# Altium PCB stepperRegulator.PcbDoc
Units mm, origin at the board's own origin, x right, y up, seen from the top; angles counter-clockwise.
Board outline 152.4 x 101.6 mm, 2 copper layers (Top Layer, Bottom Layer); 121 components, 46 nets, 290 pads, 0 vias.
Unrouted connection lines stored in the file: 232.
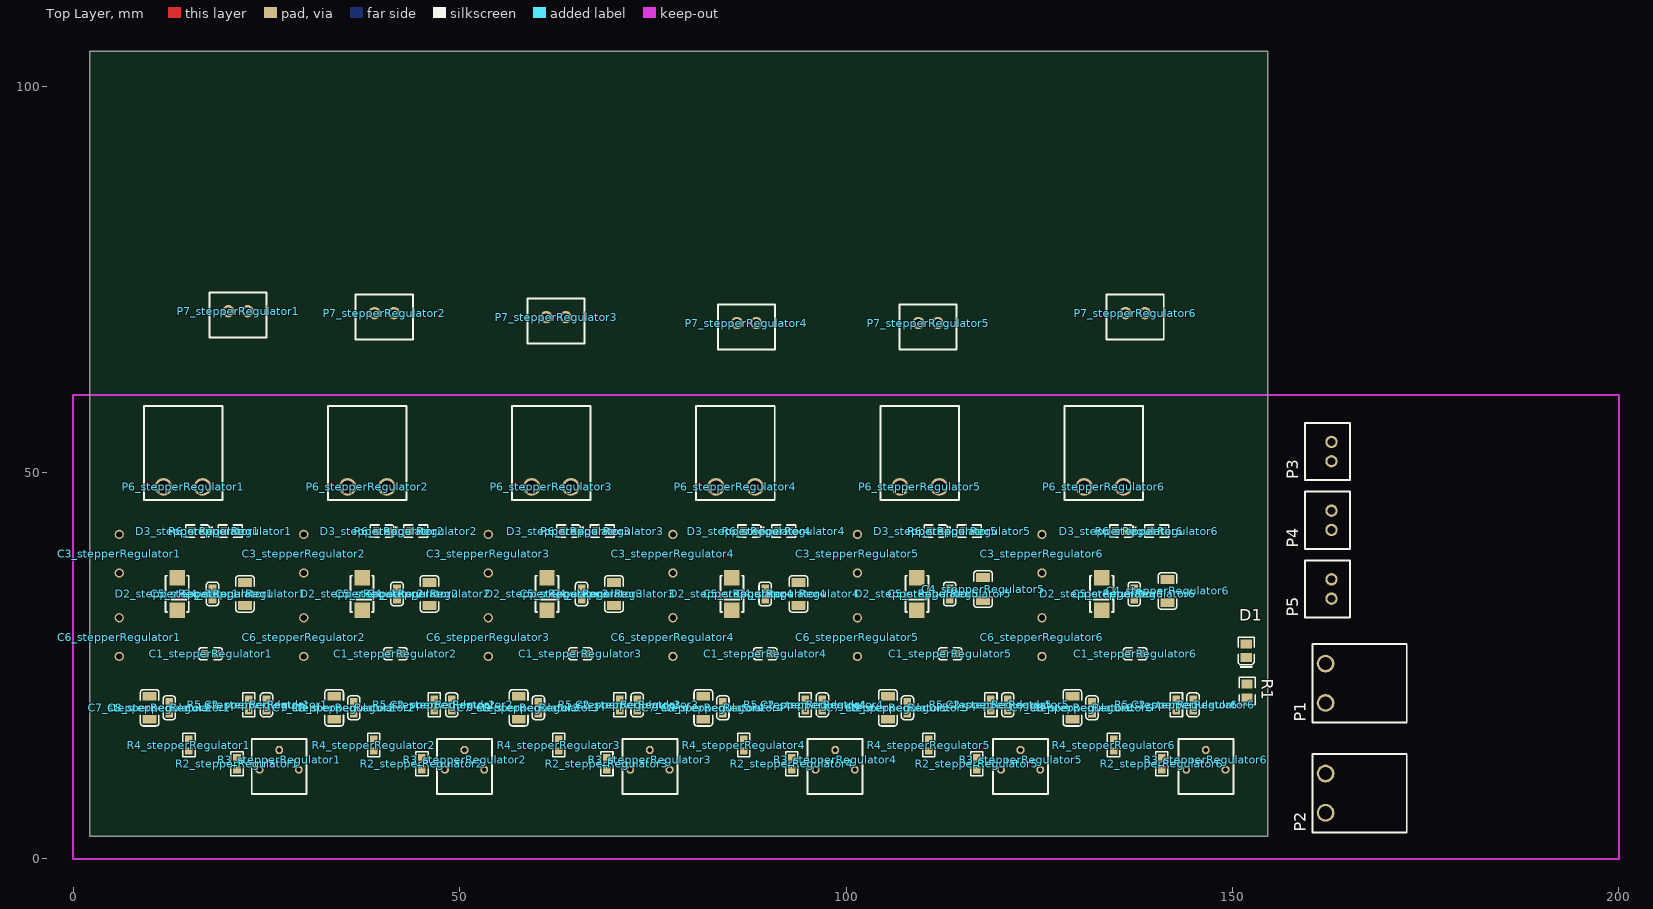
[diagram p0: Top Layer view]
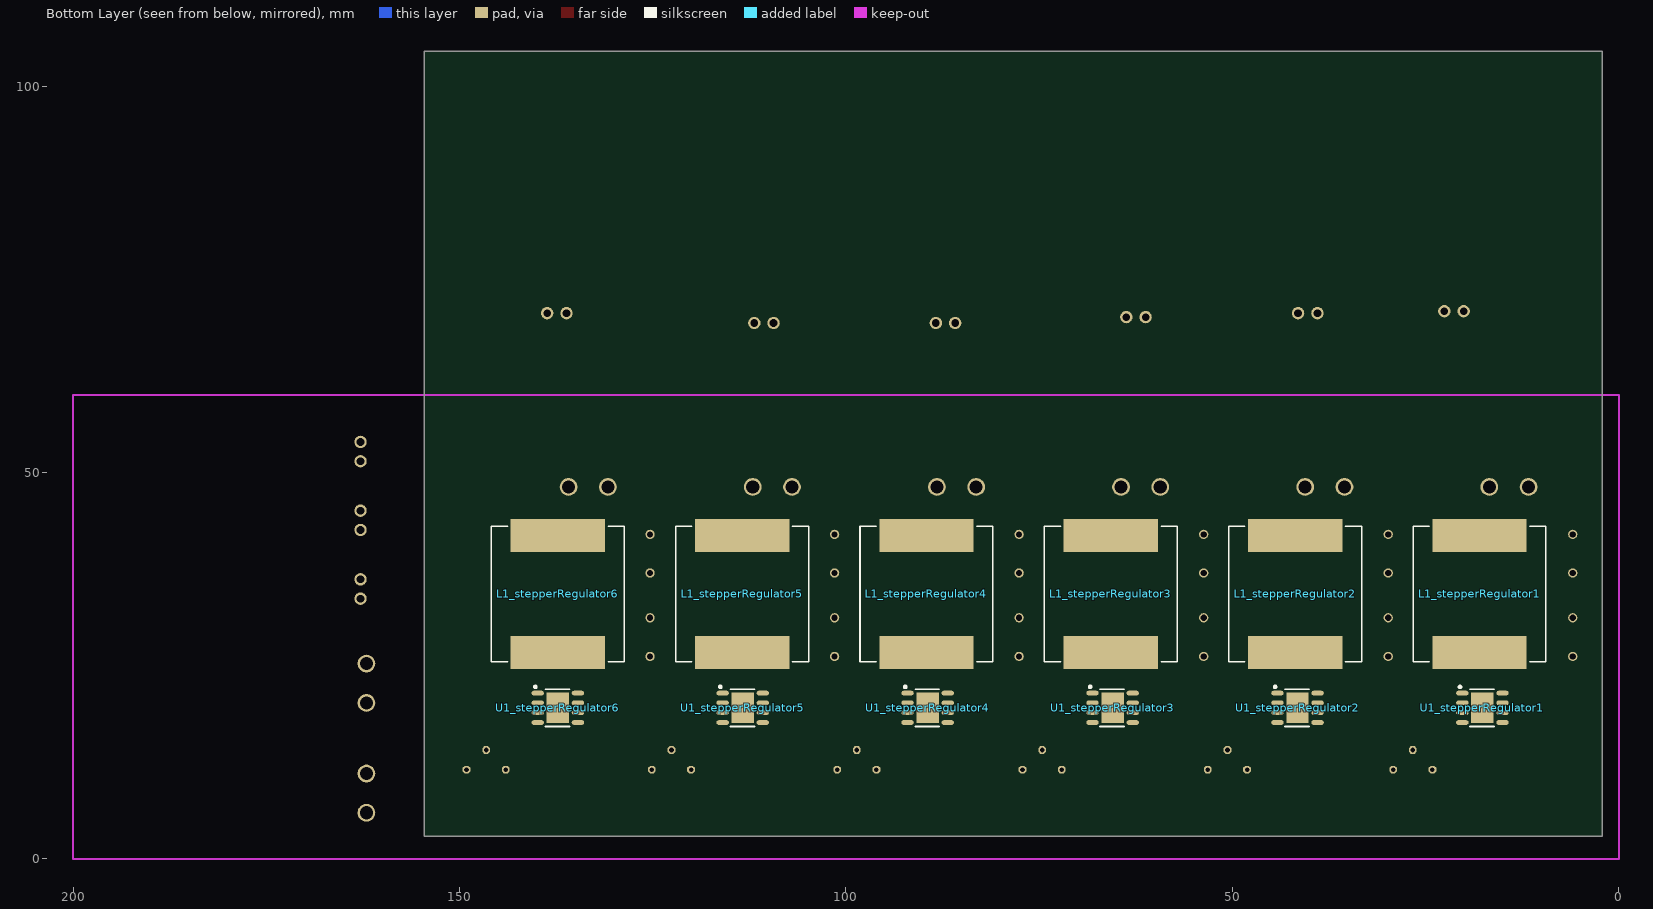
[diagram p1: Bottom Layer view, seen from below]

## Layer stack, top to bottom
Top Layer: signal copper 0.0356
Dielectric: dielectric 0.32, FR-4, Dk 4.8
Bottom Layer: signal copper 0.0356

## Board outline
2.159,2.921 154.559,2.921 154.559,104.521 2.159,104.521

## Design rules (kind name [scope] priority, off if disabled: settings)
Clearance [All] p1: gap=0.254
PolygonConnect [All] p1: connectstyle=Relief reliefconductorwidth=0.254 reliefentries=4 polygonreliefangle="90 Angle" airgapwidth=0.254
RoutingVias [All] p1: holewidth=0.711 width=1.27 viastyle="Through Hole" minholewidth=0.711 minwidth=1.27 maxholewidth=0.711 maxwidth=1.27
SolderMaskExpansion [All] p1: expansion=0.102
Width [All] p1: maxlimit=0.254 minlimit=0.254 preferedwidth=0.254
28 further rules are at their usual default settings.

## Classes and differential pairs
channel class TPS5450: stepperRegulator1 stepperRegulator2 stepperRegulator3 stepperRegulator4 stepperRegulator5 stepperRegulator6
net class SAFTY[1..6]: SAFTY6
component class stepperRegulator6: C1_stepperRegulator6 C2_stepperRegulator6 C3_stepperRegulator6 C4_stepperRegulator6 C5_stepperRegulator6 C6_stepperRegulator6 C7_stepperRegulator6 C8_stepperRegulator6 D2_stepperRegulator6 D3_stepperRegulator6 L1_stepperRegulator6 P6_stepperRegulator6 P7_stepperRegulator6 R2_stepperRegulator6 R3_stepperRegulator6 R4_stepperRegulator6 R5_stepperRegulator6 R6_stepperRegulator6 U1_stepperRegulator6
component class stepperRegulator5: C1_stepperRegulator5 C2_stepperRegulator5 C3_stepperRegulator5 C4_stepperRegulator5 C5_stepperRegulator5 C6_stepperRegulator5 C7_stepperRegulator5 C8_stepperRegulator5 D2_stepperRegulator5 D3_stepperRegulator5 L1_stepperRegulator5 P6_stepperRegulator5 P7_stepperRegulator5 R2_stepperRegulator5 R3_stepperRegulator5 R4_stepperRegulator5 R5_stepperRegulator5 R6_stepperRegulator5 U1_stepperRegulator5
component class stepperRegulator4: C1_stepperRegulator4 C2_stepperRegulator4 C3_stepperRegulator4 C4_stepperRegulator4 C5_stepperRegulator4 C6_stepperRegulator4 C7_stepperRegulator4 C8_stepperRegulator4 D2_stepperRegulator4 D3_stepperRegulator4 L1_stepperRegulator4 P6_stepperRegulator4 P7_stepperRegulator4 R2_stepperRegulator4 R3_stepperRegulator4 R4_stepperRegulator4 R5_stepperRegulator4 R6_stepperRegulator4 U1_stepperRegulator4
component class stepperRegulator3: C1_stepperRegulator3 C2_stepperRegulator3 C3_stepperRegulator3 C4_stepperRegulator3 C5_stepperRegulator3 C6_stepperRegulator3 C7_stepperRegulator3 C8_stepperRegulator3 D2_stepperRegulator3 D3_stepperRegulator3 L1_stepperRegulator3 P6_stepperRegulator3 P7_stepperRegulator3 R2_stepperRegulator3 R3_stepperRegulator3 R4_stepperRegulator3 R5_stepperRegulator3 R6_stepperRegulator3 U1_stepperRegulator3
component class stepperRegulator2: C1_stepperRegulator2 C2_stepperRegulator2 C3_stepperRegulator2 C4_stepperRegulator2 C5_stepperRegulator2 C6_stepperRegulator2 C7_stepperRegulator2 C8_stepperRegulator2 D2_stepperRegulator2 D3_stepperRegulator2 L1_stepperRegulator2 P6_stepperRegulator2 P7_stepperRegulator2 R2_stepperRegulator2 R3_stepperRegulator2 R4_stepperRegulator2 R5_stepperRegulator2 R6_stepperRegulator2 U1_stepperRegulator2
component class stepperRegulator1: C1_stepperRegulator1 C2_stepperRegulator1 C3_stepperRegulator1 C4_stepperRegulator1 C5_stepperRegulator1 C6_stepperRegulator1 C7_stepperRegulator1 C8_stepperRegulator1 D2_stepperRegulator1 D3_stepperRegulator1 L1_stepperRegulator1 P6_stepperRegulator1 P7_stepperRegulator1 R2_stepperRegulator1 R3_stepperRegulator1 R4_stepperRegulator1 R5_stepperRegulator1 R6_stepperRegulator1 U1_stepperRegulator1
component class mainPower: D1 P1 P2 P3 P4 P5 R1

## Components (designator, comment, footprint, x,y, rotation, side; value= is the part's Value field where it differs from the comment)
C1_stepperRegulator1 "10nF (103) 10% 50V" 0603_C 17.78,26.543 r180 top (schematic designator C1)
C1_stepperRegulator2 "10nF (103) 10% 50V" 0603_C 41.707,26.543 r180 top (schematic designator C1)
C1_stepperRegulator3 "10nF (103) 10% 50V" 0603_C 65.634,26.543 r180 top (schematic designator C1)
C1_stepperRegulator4 "10nF (103) 10% 50V" 0603_C 89.56,26.543 r180 top (schematic designator C1)
C1_stepperRegulator5 "10nF (103) 10% 50V" 0603_C 113.487,26.543 r180 top (schematic designator C1)
C1_stepperRegulator6 "10nF (103) 10% 50V" 0603_C 137.414,26.543 r180 top (schematic designator C1)
C2_stepperRegulator1 "1nF (102) 10% 50V" 0603_C 25.019,19.939 r270 top (schematic designator C2)
C2_stepperRegulator2 "1nF (102) 10% 50V" 0603_C 48.997,19.939 r270 top (schematic designator C2)
C2_stepperRegulator3 "1nF (102) 10% 50V" 0603_C 72.974,19.939 r270 top (schematic designator C2)
C2_stepperRegulator4 "1nF (102) 10% 50V" 0603_C 96.952,19.939 r270 top (schematic designator C2)
C2_stepperRegulator5 "1nF (102) 10% 50V" 0603_C 120.929,19.939 r270 top (schematic designator C2)
C2_stepperRegulator6 "1nF (102) 10% 50V" 0603_C 144.907,19.939 r270 top (schematic designator C2)
C3_stepperRegulator1 "Cap" C100uF 5.969,39.497 r180 top locked (schematic designator C3)
C3_stepperRegulator2 "Cap" C100uF 29.845,39.497 r180 top locked (schematic designator C3)
C3_stepperRegulator3 "Cap" C100uF 53.721,39.497 r180 top locked (schematic designator C3)
C3_stepperRegulator4 "Cap" C100uF 77.597,39.497 r0 top locked (schematic designator C3)
C3_stepperRegulator5 "Cap" C100uF 101.473,39.497 r180 top locked (schematic designator C3)
C3_stepperRegulator6 "Cap" C100uF 125.349,39.497 r0 top locked (schematic designator C3)
C4_stepperRegulator1 "10uF (106) 10% 50V" 1206_C 22.225,34.29 r90 top (schematic designator C4)
C4_stepperRegulator2 "10uF (106) 10% 50V" 1206_C 46.101,34.29 r90 top (schematic designator C4)
C4_stepperRegulator3 "10uF (106) 10% 50V" 1206_C 69.977,34.29 r90 top (schematic designator C4)
C4_stepperRegulator4 "10uF (106) 10% 50V" 1206_C 93.853,34.29 r90 top (schematic designator C4)
C4_stepperRegulator5 "10uF (106) 10% 50V" 1206_C 117.729,34.925 r90 top (schematic designator C4)
C4_stepperRegulator6 "10uF (106) 10% 50V" 1206_C 141.605,34.671 r90 top (schematic designator C4)
C5_stepperRegulator1 "10nF (103) 10% 50V" 0603_C 18.034,34.29 r90 top (schematic designator C5)
C5_stepperRegulator2 "10nF (103) 10% 50V" 0603_C 41.91,34.29 r90 top (schematic designator C5)
C5_stepperRegulator3 "10nF (103) 10% 50V" 0603_C 65.786,34.29 r90 top (schematic designator C5)
C5_stepperRegulator4 "10nF (103) 10% 50V" 0603_C 89.535,34.29 r90 top (schematic designator C5)
C5_stepperRegulator5 "10nF (103) 10% 50V" 0603_C 113.411,34.29 r90 top (schematic designator C5)
C5_stepperRegulator6 "10nF (103) 10% 50V" 0603_C 137.287,34.29 r90 top (schematic designator C5)
C6_stepperRegulator1 "Cap" C100uF 5.969,28.702 r0 top locked (schematic designator C6)
C6_stepperRegulator2 "Cap" C100uF 29.845,28.702 r180 top locked (schematic designator C6)
C6_stepperRegulator3 "Cap" C100uF 53.721,28.702 r180 top locked (schematic designator C6)
C6_stepperRegulator4 "Cap" C100uF 77.597,28.702 r180 top locked (schematic designator C6)
C6_stepperRegulator5 "Cap" C100uF 101.473,28.702 r180 top locked (schematic designator C6)
C6_stepperRegulator6 "Cap" C100uF 125.349,28.702 r180 top locked (schematic designator C6)
C7_stepperRegulator1 "10uF (106) 10% 50V" 1206_C 9.906,19.558 r90 top (schematic designator C7)
C7_stepperRegulator2 "10uF (106) 10% 50V" 1206_C 33.782,19.558 r90 top (schematic designator C7)
C7_stepperRegulator3 "10uF (106) 10% 50V" 1206_C 57.658,19.558 r90 top (schematic designator C7)
C7_stepperRegulator4 "10uF (106) 10% 50V" 1206_C 81.534,19.558 r90 top (schematic designator C7)
C7_stepperRegulator5 "10uF (106) 10% 50V" 1206_C 105.41,19.558 r90 top (schematic designator C7)
C7_stepperRegulator6 "10uF (106) 10% 50V" 1206_C 129.286,19.558 r90 top (schematic designator C7)
C8_stepperRegulator1 "10nF (103) 10% 50V" 0603_C 12.446,19.558 r90 top (schematic designator C8)
C8_stepperRegulator2 "10nF (103) 10% 50V" 0603_C 36.322,19.558 r90 top (schematic designator C8)
C8_stepperRegulator3 "10nF (103) 10% 50V" 0603_C 60.198,19.558 r90 top (schematic designator C8)
C8_stepperRegulator4 "10nF (103) 10% 50V" 0603_C 84.074,19.558 r90 top (schematic designator C8)
C8_stepperRegulator5 "10nF (103) 10% 50V" 0603_C 107.95,19.558 r90 top (schematic designator C8)
C8_stepperRegulator6 "10nF (103) 10% 50V" 0603_C 131.826,19.558 r90 top (schematic designator C8)
D1 "白灯 0805" 0805_LED_S1 151.765,26.924 r90 top
D2_stepperRegulator1 "SS54" SMA(DO-214AC)_S1 13.462,34.29 r90 top (schematic designator D2)
D2_stepperRegulator2 "SS54" SMA(DO-214AC)_S1 37.389,34.29 r90 top (schematic designator D2)
D2_stepperRegulator3 "SS54" SMA(DO-214AC)_S1 61.316,34.29 r90 top (schematic designator D2)
D2_stepperRegulator4 "SS54" SMA(DO-214AC)_S1 85.242,34.29 r90 top (schematic designator D2)
D2_stepperRegulator5 "SS54" SMA(DO-214AC)_S1 109.169,34.29 r90 top (schematic designator D2)
D2_stepperRegulator6 "SS54" SMA(DO-214AC)_S1 133.096,34.29 r90 top (schematic designator D2)
D3_stepperRegulator1 "绿灯 0603" 0603_LED_S1 16.129,42.418 r180 top (schematic designator D3)
D3_stepperRegulator2 "绿灯 0603" 0603_LED_S1 40.004,42.418 r180 top (schematic designator D3)
D3_stepperRegulator3 "绿灯 0603" 0603_LED_S1 64.135,42.418 r180 top (schematic designator D3)
D3_stepperRegulator4 "绿灯 0603" 0603_LED_S1 87.503,42.418 r180 top (schematic designator D3)
D3_stepperRegulator5 "绿灯 0603" 0603_LED_S1 111.633,42.418 r180 top (schematic designator D3)
D3_stepperRegulator6 "绿灯 0603" 0603_LED_S1 135.636,42.418 r180 top (schematic designator D3)
L1_stepperRegulator1 "Inductor" INDP175172X70M 18.034,34.29 r90 bottom locked (schematic designator L1)
L1_stepperRegulator2 "Inductor" INDP175172X70M 41.885,34.29 r90 bottom locked (schematic designator L1)
L1_stepperRegulator3 "Inductor" INDP175172X70M 65.735,34.29 r90 bottom locked (schematic designator L1)
L1_stepperRegulator4 "Inductor" INDP175172X70M 89.586,34.29 r90 bottom locked (schematic designator L1)
L1_stepperRegulator5 "Inductor" INDP175172X70M 113.436,34.29 r90 bottom locked (schematic designator L1)
L1_stepperRegulator6 "Inductor" INDP175172X70M 137.287,34.29 r90 bottom locked (schematic designator L1)
P1 "Header 2" 5.08-2P 162.052,22.733 r90 top
P2 "Header 2" 5.08-2P 162.052,8.509 r90 top
P3 "Header 2" XH-2A 162.814,52.705 r90 top
P4 "Header 2" XH-2A 162.814,43.815 r90 top
P5 "Header 2" XH-2A 162.814,34.925 r90 top
P6_stepperRegulator1 "Header 2" 5.08-2P 14.224,48.133 r180 top (schematic designator P6)
P6_stepperRegulator2 "Header 2" 5.08-2P 38.049,48.133 r180 top (schematic designator P6)
P6_stepperRegulator3 "Header 2" 5.08-2P 61.874,48.133 r180 top (schematic designator P6)
P6_stepperRegulator4 "Header 2" 5.08-2P 85.7,48.133 r180 top (schematic designator P6)
P6_stepperRegulator5 "Header 2" 5.08-2P 109.525,48.133 r180 top (schematic designator P6)
P6_stepperRegulator6 "Header 2" 5.08-2P 133.35,48.133 r180 top (schematic designator P6)
P7_stepperRegulator1 "Header 2" XH-2A 21.336,70.866 r180 top (schematic designator P7)
P7_stepperRegulator2 "Header 2" XH-2A 40.259,70.612 r180 top (schematic designator P7)
P7_stepperRegulator3 "Header 2" XH-2A 62.484,70.104 r180 top (schematic designator P7)
P7_stepperRegulator4 "Header 2" XH-2A 87.122,69.342 r180 top (schematic designator P7)
P7_stepperRegulator5 "Header 2" XH-2A 110.617,69.342 r180 top (schematic designator P7)
P7_stepperRegulator6 "Header 2" XH-2A 137.414,70.612 r180 top (schematic designator P7)
R1 "10KΩ (1002) ±1%" 0805_R 151.892,21.717 r270 top
R2_stepperRegulator1 "510Ω (5100) ±1%" 0603_R 21.209,12.319 r270 top (schematic designator R2)
R2_stepperRegulator2 "510Ω (5100) ±1%" 0603_R 45.136,12.319 r270 top (schematic designator R2)
R2_stepperRegulator3 "510Ω (5100) ±1%" 0603_R 69.063,12.319 r270 top (schematic designator R2)
R2_stepperRegulator4 "510Ω (5100) ±1%" 0603_R 92.989,12.319 r270 top (schematic designator R2)
R2_stepperRegulator5 "510Ω (5100) ±1%" 0603_R 116.916,12.319 r270 top (schematic designator R2)
R2_stepperRegulator6 "510Ω (5100) ±1%" 0603_R 140.843,12.319 r270 top (schematic designator R2)
R3_stepperRegulator1 "RPot" RP1 26.67,12.827 r0 top (schematic designator R3)
R3_stepperRegulator2 "RPot" RP1 50.648,12.827 r0 top (schematic designator R3)
R3_stepperRegulator3 "RPot" RP1 74.625,12.827 r0 top (schematic designator R3)
R3_stepperRegulator4 "RPot" RP1 98.603,12.827 r0 top (schematic designator R3)
R3_stepperRegulator5 "RPot" RP1 122.58,12.827 r0 top (schematic designator R3)
R3_stepperRegulator6 "RPot" RP1 146.558,12.827 r0 top (schematic designator R3)
R4_stepperRegulator1 "100KΩ (1003) ±1%" 0603_R 14.986,14.732 r270 top (schematic designator R4)
R4_stepperRegulator2 "100KΩ (1003) ±1%" 0603_R 38.913,14.732 r270 top (schematic designator R4)
R4_stepperRegulator3 "100KΩ (1003) ±1%" 0603_R 62.84,14.732 r270 top (schematic designator R4)
R4_stepperRegulator4 "100KΩ (1003) ±1%" 0603_R 86.766,14.732 r270 top (schematic designator R4)
R4_stepperRegulator5 "100KΩ (1003) ±1%" 0603_R 110.693,14.732 r270 top (schematic designator R4)
R4_stepperRegulator6 "100KΩ (1003) ±1%" 0603_R 134.62,14.732 r270 top (schematic designator R4)
R5_stepperRegulator1 "10KΩ (1002) ±1%" 0603_R 22.733,19.939 r270 top (schematic designator R5)
R5_stepperRegulator2 "10KΩ (1002) ±1%" 0603_R 46.736,19.939 r270 top (schematic designator R5)
R5_stepperRegulator3 "10KΩ (1002) ±1%" 0603_R 70.739,19.939 r270 top (schematic designator R5)
R5_stepperRegulator4 "10KΩ (1002) ±1%" 0603_R 94.742,19.939 r270 top (schematic designator R5)
R5_stepperRegulator5 "10KΩ (1002) ±1%" 0603_R 118.745,19.939 r270 top (schematic designator R5)
R5_stepperRegulator6 "10KΩ (1002) ±1%" 0603_R 142.748,19.939 r270 top (schematic designator R5)
R6_stepperRegulator1 "10KΩ (1002) ±1%" 0603_R 20.32,42.418 r0 top (schematic designator R6)
R6_stepperRegulator2 "10KΩ (1002) ±1%" 0603_R 44.323,42.418 r0 top (schematic designator R6)
R6_stepperRegulator3 "10KΩ (1002) ±1%" 0603_R 68.453,42.418 r0 top (schematic designator R6)
R6_stepperRegulator4 "10KΩ (1002) ±1%" 0603_R 91.948,42.418 r0 top (schematic designator R6)
R6_stepperRegulator5 "10KΩ (1002) ±1%" 0603_R 115.951,42.418 r0 top (schematic designator R6)
R6_stepperRegulator6 "10KΩ (1002) ±1%" 0603_R 140.208,42.418 r0 top (schematic designator R6)
U1_stepperRegulator1 "TPS5450" LC-SOP-8_EP_150mil 17.653,19.558 r270 bottom (schematic designator U1)
U1_stepperRegulator2 "TPS5450" LC-SOP-8_EP_150mil 41.58,19.558 r270 bottom (schematic designator U1)
U1_stepperRegulator3 "TPS5450" LC-SOP-8_EP_150mil 65.507,19.558 r270 bottom (schematic designator U1)
U1_stepperRegulator4 "TPS5450" LC-SOP-8_EP_150mil 89.433,19.558 r270 bottom (schematic designator U1)
U1_stepperRegulator5 "TPS5450" LC-SOP-8_EP_150mil 113.36,19.558 r270 bottom (schematic designator U1)
U1_stepperRegulator6 "TPS5450" LC-SOP-8_EP_150mil 137.287,19.558 r270 bottom (schematic designator U1)

## Footprints (in the part's own frame and the unit in brackets; to place one, negate y for a bottom-side part, rotate by r counter-clockwise, add the part's x,y. Pads: shape width x height; smd on the part's side, far side on the other; paste and mask are expansions set on the pad)
5.08-2P [mm]
  round 2.3 hole 1.7: 1(-2.54,0) 2(2.54,0)
  silkscreen extent -5.08,-10.5 5.08,1.7
0603_C [mm]
  rect 0.93x0.98 smd: 1(-0.77,0) 2(0.77,0)
  silkscreen extent -1.53,-0.79 1.54,0.79, body extent -0.8,-0.4 0.8,0.4, height 0.3
0603_LED_S1 [mm]
  rect 0.93x0.98 smd: A(0.77,0) K(-0.77,0)
  silkscreen extent -1.97,-0.79 1.54,0.79, body extent -0.8,-0.4 0.8,0.4, height 0.6
0603_R [mm]
  rect 0.93x0.98 smd: 1(-0.77,0) 2(0.77,0)
  silkscreen extent -1.53,-0.79 1.54,0.79, body extent -0.85,-0.4 0.85,0.4, height 0.56
0805_LED_S1 [mm]
  rect 1.16x1.47 smd: A(0.89,0) K(-0.89,0)
  silkscreen extent -2.24,-1.04 1.77,1.03, body extent -1.01,-0.62 1.01,0.62, height 1.1
0805_R [mm]
  rect 1.16x1.47 smd: 1(-0.89,0) 2(0.89,0)
  silkscreen extent -1.77,-1.04 1.77,1.03, body extent -1,-0.62 1,0.63, height 0.49
1206_C [mm]
  rect 1.13x1.8 smd: 1(-1.49,0) 2(1.49,0)
  silkscreen extent -2.36,-1.2 2.35,1.2, body extent -1.6,-0.81 1.6,0.79, height 1
C100uF [mm]
  round 1.2 hole 0.8: 1(0,2.5) 2(0,-2.5)
INDP175172X70M [mm] "Precision Wire Wound Inductor, 2-Leads, Body 17.50x17.15mm, IPC Low Density"
  rect 4.25x12.2 smd: 1(-7.575,0) 2(7.575,0)
  silkscreen extent -8.75,-8.6 8.75,8.6, body extent -8.75,-8.57 8.75,8.57, height 7
LC-SOP-8_EP_150mil [mm] "TPS5450"
  rect 4x2.9 smd: 0(0,0)
  oval 0.6x1.6 smd: 1(-1.905,-2.6) 2(-0.635,-2.6) 3(0.635,-2.6) 4(1.905,-2.6) 5(1.905,2.6) 6(0.635,2.6) 7(-0.635,2.6) 8(-1.905,2.6)
  silkscreen extent -2.85,-3.05 2.4,1.5
RP1 [mm]
  oct 1x1 hole 0.6: 1(-2.54,-1.27) 2(0,1.27) 3(2.54,-1.27)
  silkscreen extent -3.56,-4.44 3.56,2.67, body extent -3.56,-4.44 3.56,2.67, height 6.35
SMA(DO-214AC)_S1 [mm]
  rect 2x2 smd: 1(2.1,0) 2(-2.1,0)
  silkscreen extent -2.35,-1.5 2.35,1.5
XH-2A [mm]
  round 1.6 hole 1: 1(-1.25,0) 2(1.25,0)
  silkscreen extent -3.7,-2.4 3.7,3.4

## Part data
C1_stepperRegulator1 C1_stepperRegulator2 C1_stepperRegulator3 C1_stepperRegulator4 C1_stepperRegulator5 C1_stepperRegulator6 C5_stepperRegulator1 C5_stepperRegulator2 C5_stepperRegulator3 C5_stepperRegulator4 C5_stepperRegulator5 C5_stepperRegulator6 C8_stepperRegulator1 C8_stepperRegulator2 C8_stepperRegulator3 C8_stepperRegulator4 C8_stepperRegulator5 C8_stepperRegulator6: library part "0603 10nF (103) 10% 50V", "贴片电容"
C2_stepperRegulator1 C2_stepperRegulator2 C2_stepperRegulator3 C2_stepperRegulator4 C2_stepperRegulator5 C2_stepperRegulator6: library part "0603 1nF (102) 10% 50V", "贴片电容"
C3_stepperRegulator1 C3_stepperRegulator2 C3_stepperRegulator3 C3_stepperRegulator4 C3_stepperRegulator5 C3_stepperRegulator6 C6_stepperRegulator1 C6_stepperRegulator2 C6_stepperRegulator3 C6_stepperRegulator4 C6_stepperRegulator5 C6_stepperRegulator6: "贴片电容"
C4_stepperRegulator1 C4_stepperRegulator2 C4_stepperRegulator3 C4_stepperRegulator4 C4_stepperRegulator5 C4_stepperRegulator6 C7_stepperRegulator1 C7_stepperRegulator2 C7_stepperRegulator3 C7_stepperRegulator4 C7_stepperRegulator5 C7_stepperRegulator6: library part "1206 10uF (106) 10% 50V", "贴片电容"
D1: library part "0805 白灯", "发光二极管"
D2_stepperRegulator1 D2_stepperRegulator2 D2_stepperRegulator3 D2_stepperRegulator4 D2_stepperRegulator5 D2_stepperRegulator6: library part "SMA(DO-214AC) SS54", "二极管"
D3_stepperRegulator1 D3_stepperRegulator2 D3_stepperRegulator3 D3_stepperRegulator4 D3_stepperRegulator5 D3_stepperRegulator6: library part "0603 绿灯", "发光二极管"
P1 P2 P3 P4 P5 P6_stepperRegulator1 P6_stepperRegulator2 P6_stepperRegulator3 P6_stepperRegulator4 P6_stepperRegulator5 P6_stepperRegulator6 P7_stepperRegulator1 P7_stepperRegulator2 P7_stepperRegulator3 P7_stepperRegulator4 P7_stepperRegulator5 P7_stepperRegulator6: "Header, 2-Pin"
R1: library part "0805 10KΩ (1002) 1%", "贴片电阻"
R2_stepperRegulator1 R2_stepperRegulator2 R2_stepperRegulator3 R2_stepperRegulator4 R2_stepperRegulator5 R2_stepperRegulator6: library part "0603 510Ω (5100) 1%", "贴片电阻"
R3_stepperRegulator1 R3_stepperRegulator2 R3_stepperRegulator3 R3_stepperRegulator4 R3_stepperRegulator5 R3_stepperRegulator6: "电位器"
R4_stepperRegulator1 R4_stepperRegulator2 R4_stepperRegulator3 R4_stepperRegulator4 R4_stepperRegulator5 R4_stepperRegulator6: library part "0603 100KΩ (1003) 1%", "贴片电阻"
R5_stepperRegulator1 R5_stepperRegulator2 R5_stepperRegulator3 R5_stepperRegulator4 R5_stepperRegulator5 R5_stepperRegulator6 R6_stepperRegulator1 R6_stepperRegulator2 R6_stepperRegulator3 R6_stepperRegulator4 R6_stepperRegulator5 R6_stepperRegulator6: library part "0603 10KΩ (1002) 1%", "贴片电阻"

## Nets (pads, with @x,y where several pads share a name; then routed paths per layer and width w, separated by ;. In a path a pad name is that pad's centre, name@x,y a point inside that pad or via, vN(x,y) a via of type N, cw(c..) or ccw(c..) an arc to the next point about the centre after c; other vN are vias at no path point)
+24: C6_stepperRegulator1.2 C6_stepperRegulator2.2 C6_stepperRegulator3.2 C6_stepperRegulator4.2 C6_stepperRegulator5.2 C6_stepperRegulator6.2 C7_stepperRegulator1.2 C7_stepperRegulator2.2 C7_stepperRegulator3.2 C7_stepperRegulator4.2 C7_stepperRegulator5.2 C7_stepperRegulator6.2 C8_stepperRegulator1.2 C8_stepperRegulator2.2 C8_stepperRegulator3.2 C8_stepperRegulator4.2 C8_stepperRegulator5.2 C8_stepperRegulator6.2 D1.A P1.1 P3.2 P4.2 P5.2 U1_stepperRegulator1.7 U1_stepperRegulator2.7 U1_stepperRegulator3.7 U1_stepperRegulator4.7 U1_stepperRegulator5.7 U1_stepperRegulator6.7
EGND: C3_stepperRegulator1.1 C3_stepperRegulator2.1 C3_stepperRegulator3.1 C3_stepperRegulator4.1 C3_stepperRegulator5.1 C3_stepperRegulator6.1 C4_stepperRegulator1.1 C4_stepperRegulator2.1 C4_stepperRegulator3.1 C4_stepperRegulator4.1 C4_stepperRegulator5.1 C4_stepperRegulator6.1 C5_stepperRegulator1.1 C5_stepperRegulator2.1 C5_stepperRegulator3.1 C5_stepperRegulator4.1 C5_stepperRegulator5.1 C5_stepperRegulator6.1 C6_stepperRegulator1.1 C6_stepperRegulator2.1 C6_stepperRegulator3.1 C6_stepperRegulator4.1 C6_stepperRegulator5.1 C6_stepperRegulator6.1 C7_stepperRegulator1.1 C7_stepperRegulator2.1 C7_stepperRegulator3.1 C7_stepperRegulator4.1 C7_stepperRegulator5.1 C7_stepperRegulator6.1 C8_stepperRegulator1.1 C8_stepperRegulator2.1 C8_stepperRegulator3.1 C8_stepperRegulator4.1 C8_stepperRegulator5.1 C8_stepperRegulator6.1 D2_stepperRegulator1.1 D2_stepperRegulator2.1 D2_stepperRegulator3.1 D2_stepperRegulator4.1 D2_stepperRegulator5.1 D2_stepperRegulator6.1 P1.2 P2.1 P3.1 P4.1 P5.1 P6_stepperRegulator1.2 P6_stepperRegulator2.2 P6_stepperRegulator3.2 P6_stepperRegulator4.2 P6_stepperRegulator5.2 P6_stepperRegulator6.2 P7_stepperRegulator1.1 P7_stepperRegulator2.1 P7_stepperRegulator3.1 P7_stepperRegulator4.1 P7_stepperRegulator5.1 P7_stepperRegulator6.1 R1.2 R2_stepperRegulator1.1 R2_stepperRegulator2.1 R2_stepperRegulator3.1 R2_stepperRegulator4.1 R2_stepperRegulator5.1 R2_stepperRegulator6.1 R6_stepperRegulator1.2 R6_stepperRegulator2.2 R6_stepperRegulator3.2 R6_stepperRegulator4.2 R6_stepperRegulator5.2 R6_stepperRegulator6.2 U1_stepperRegulator1.0 U1_stepperRegulator1.6 U1_stepperRegulator2.0 U1_stepperRegulator2.6 U1_stepperRegulator3.0 U1_stepperRegulator3.6 U1_stepperRegulator4.0 U1_stepperRegulator4.6 U1_stepperRegulator5.0 U1_stepperRegulator5.6 U1_stepperRegulator6.0 U1_stepperRegulator6.6
NetC1_stepperRegulator1_1: C1_stepperRegulator1.1 U1_stepperRegulator1.1
NetC1_stepperRegulator1_2: C1_stepperRegulator1.2 D2_stepperRegulator1.2 L1_stepperRegulator1.1 U1_stepperRegulator1.8
NetC1_stepperRegulator2_1: C1_stepperRegulator2.1 U1_stepperRegulator2.1
NetC1_stepperRegulator2_2: C1_stepperRegulator2.2 D2_stepperRegulator2.2 L1_stepperRegulator2.1 U1_stepperRegulator2.8
NetC1_stepperRegulator3_1: C1_stepperRegulator3.1 U1_stepperRegulator3.1
NetC1_stepperRegulator3_2: C1_stepperRegulator3.2 D2_stepperRegulator3.2 L1_stepperRegulator3.1 U1_stepperRegulator3.8
NetC1_stepperRegulator4_1: C1_stepperRegulator4.1 U1_stepperRegulator4.1
NetC1_stepperRegulator4_2: C1_stepperRegulator4.2 D2_stepperRegulator4.2 L1_stepperRegulator4.1 U1_stepperRegulator4.8
NetC1_stepperRegulator5_1: C1_stepperRegulator5.1 U1_stepperRegulator5.1
NetC1_stepperRegulator5_2: C1_stepperRegulator5.2 D2_stepperRegulator5.2 L1_stepperRegulator5.1 U1_stepperRegulator5.8
NetC1_stepperRegulator6_1: C1_stepperRegulator6.1 U1_stepperRegulator6.1
NetC1_stepperRegulator6_2: C1_stepperRegulator6.2 D2_stepperRegulator6.2 L1_stepperRegulator6.1 U1_stepperRegulator6.8
NetC2_stepperRegulator1_2: C2_stepperRegulator1.2 R3_stepperRegulator1.2 R3_stepperRegulator1.3 R5_stepperRegulator1.2 U1_stepperRegulator1.4
NetC2_stepperRegulator2_2: C2_stepperRegulator2.2 R3_stepperRegulator2.2 R3_stepperRegulator2.3 R5_stepperRegulator2.2 U1_stepperRegulator2.4
NetC2_stepperRegulator3_2: C2_stepperRegulator3.2 R3_stepperRegulator3.2 R3_stepperRegulator3.3 R5_stepperRegulator3.2 U1_stepperRegulator3.4
NetC2_stepperRegulator4_2: C2_stepperRegulator4.2 R3_stepperRegulator4.2 R3_stepperRegulator4.3 R5_stepperRegulator4.2 U1_stepperRegulator4.4
NetC2_stepperRegulator5_2: C2_stepperRegulator5.2 R3_stepperRegulator5.2 R3_stepperRegulator5.3 R5_stepperRegulator5.2 U1_stepperRegulator5.4
NetC2_stepperRegulator6_2: C2_stepperRegulator6.2 R3_stepperRegulator6.2 R3_stepperRegulator6.3 R5_stepperRegulator6.2 U1_stepperRegulator6.4
NetD1_K: D1.K R1.1
NetD3_stepperRegulator1_K: D3_stepperRegulator1.K R6_stepperRegulator1.1
NetD3_stepperRegulator2_K: D3_stepperRegulator2.K R6_stepperRegulator2.1
NetD3_stepperRegulator3_K: D3_stepperRegulator3.K R6_stepperRegulator3.1
NetD3_stepperRegulator4_K: D3_stepperRegulator4.K R6_stepperRegulator4.1
NetD3_stepperRegulator5_K: D3_stepperRegulator5.K R6_stepperRegulator5.1
NetD3_stepperRegulator6_K: D3_stepperRegulator6.K R6_stepperRegulator6.1
NetR2_stepperRegulator1_2: R2_stepperRegulator1.2 R3_stepperRegulator1.1
NetR2_stepperRegulator2_2: R2_stepperRegulator2.2 R3_stepperRegulator2.1
NetR2_stepperRegulator3_2: R2_stepperRegulator3.2 R3_stepperRegulator3.1
NetR2_stepperRegulator4_2: R2_stepperRegulator4.2 R3_stepperRegulator4.1
NetR2_stepperRegulator5_2: R2_stepperRegulator5.2 R3_stepperRegulator5.1
NetR2_stepperRegulator6_2: R2_stepperRegulator6.2 R3_stepperRegulator6.1
NetR4_stepperRegulator1_1: R4_stepperRegulator1.1 U1_stepperRegulator1.5
NetR4_stepperRegulator2_1: R4_stepperRegulator2.1 U1_stepperRegulator2.5
NetR4_stepperRegulator3_1: R4_stepperRegulator3.1 U1_stepperRegulator3.5
NetR4_stepperRegulator4_1: R4_stepperRegulator4.1 U1_stepperRegulator4.5
NetR4_stepperRegulator5_1: R4_stepperRegulator5.1 U1_stepperRegulator5.5
NetR4_stepperRegulator6_1: R4_stepperRegulator6.1 U1_stepperRegulator6.5
SAFTY6: P2.2 R4_stepperRegulator1.2 R4_stepperRegulator2.2 R4_stepperRegulator3.2 R4_stepperRegulator4.2 R4_stepperRegulator5.2 R4_stepperRegulator6.2
VM_stepperRegulator1: C2_stepperRegulator1.1 C3_stepperRegulator1.2 C4_stepperRegulator1.2 C5_stepperRegulator1.2 D3_stepperRegulator1.A L1_stepperRegulator1.2 P6_stepperRegulator1.1 P7_stepperRegulator1.2 R5_stepperRegulator1.1
VM_stepperRegulator2: C2_stepperRegulator2.1 C3_stepperRegulator2.2 C4_stepperRegulator2.2 C5_stepperRegulator2.2 D3_stepperRegulator2.A L1_stepperRegulator2.2 P6_stepperRegulator2.1 P7_stepperRegulator2.2 R5_stepperRegulator2.1
VM_stepperRegulator3: C2_stepperRegulator3.1 C3_stepperRegulator3.2 C4_stepperRegulator3.2 C5_stepperRegulator3.2 D3_stepperRegulator3.A L1_stepperRegulator3.2 P6_stepperRegulator3.1 P7_stepperRegulator3.2 R5_stepperRegulator3.1
VM_stepperRegulator4: C2_stepperRegulator4.1 C3_stepperRegulator4.2 C4_stepperRegulator4.2 C5_stepperRegulator4.2 D3_stepperRegulator4.A L1_stepperRegulator4.2 P6_stepperRegulator4.1 P7_stepperRegulator4.2 R5_stepperRegulator4.1
VM_stepperRegulator5: C2_stepperRegulator5.1 C3_stepperRegulator5.2 C4_stepperRegulator5.2 C5_stepperRegulator5.2 D3_stepperRegulator5.A L1_stepperRegulator5.2 P6_stepperRegulator5.1 P7_stepperRegulator5.2 R5_stepperRegulator5.1
VM_stepperRegulator6: C2_stepperRegulator6.1 C3_stepperRegulator6.2 C4_stepperRegulator6.2 C5_stepperRegulator6.2 D3_stepperRegulator6.A L1_stepperRegulator6.2 P6_stepperRegulator6.1 P7_stepperRegulator6.2 R5_stepperRegulator6.1
pads on no net: U1_stepperRegulator1.2 U1_stepperRegulator1.3 U1_stepperRegulator2.2 U1_stepperRegulator2.3 U1_stepperRegulator3.2 U1_stepperRegulator3.3 U1_stepperRegulator4.2 U1_stepperRegulator4.3 U1_stepperRegulator5.2 U1_stepperRegulator5.3 U1_stepperRegulator6.2 U1_stepperRegulator6.3

## Keep-outs
Keep-Out Layer:
  lines w0.254: 0,0 0,60 200,60 200,0 0,0